# Altium PCB PCBbase.PcbDoc
Units mm, origin at the board's own origin, x right, y up, seen from the top; angles counter-clockwise.
Board outline 75.1 x 58.9 mm, 2 copper layers (Top Layer, Bottom Layer), stack 1.58 mm thick; 42 components, 28 nets, 143 pads, 38 vias.
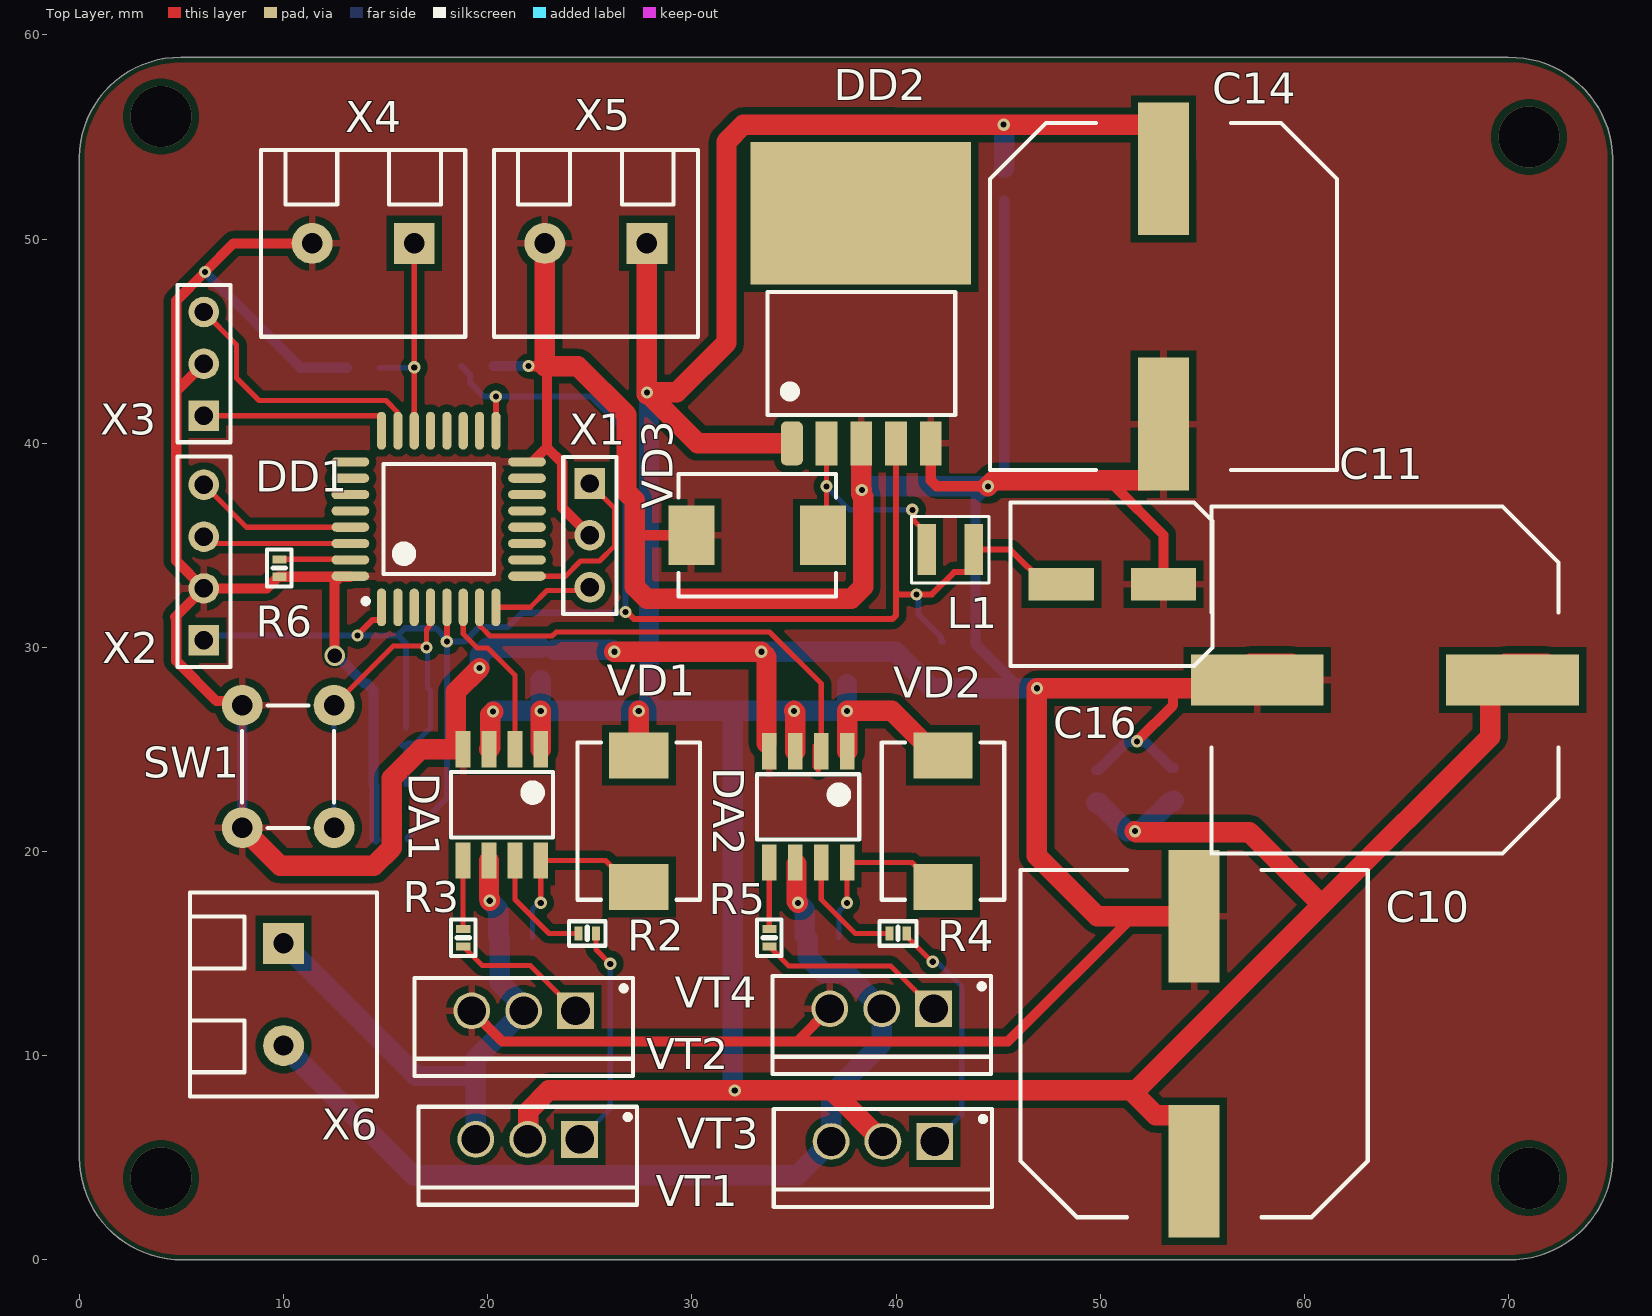
[diagram p0: Top Layer view]
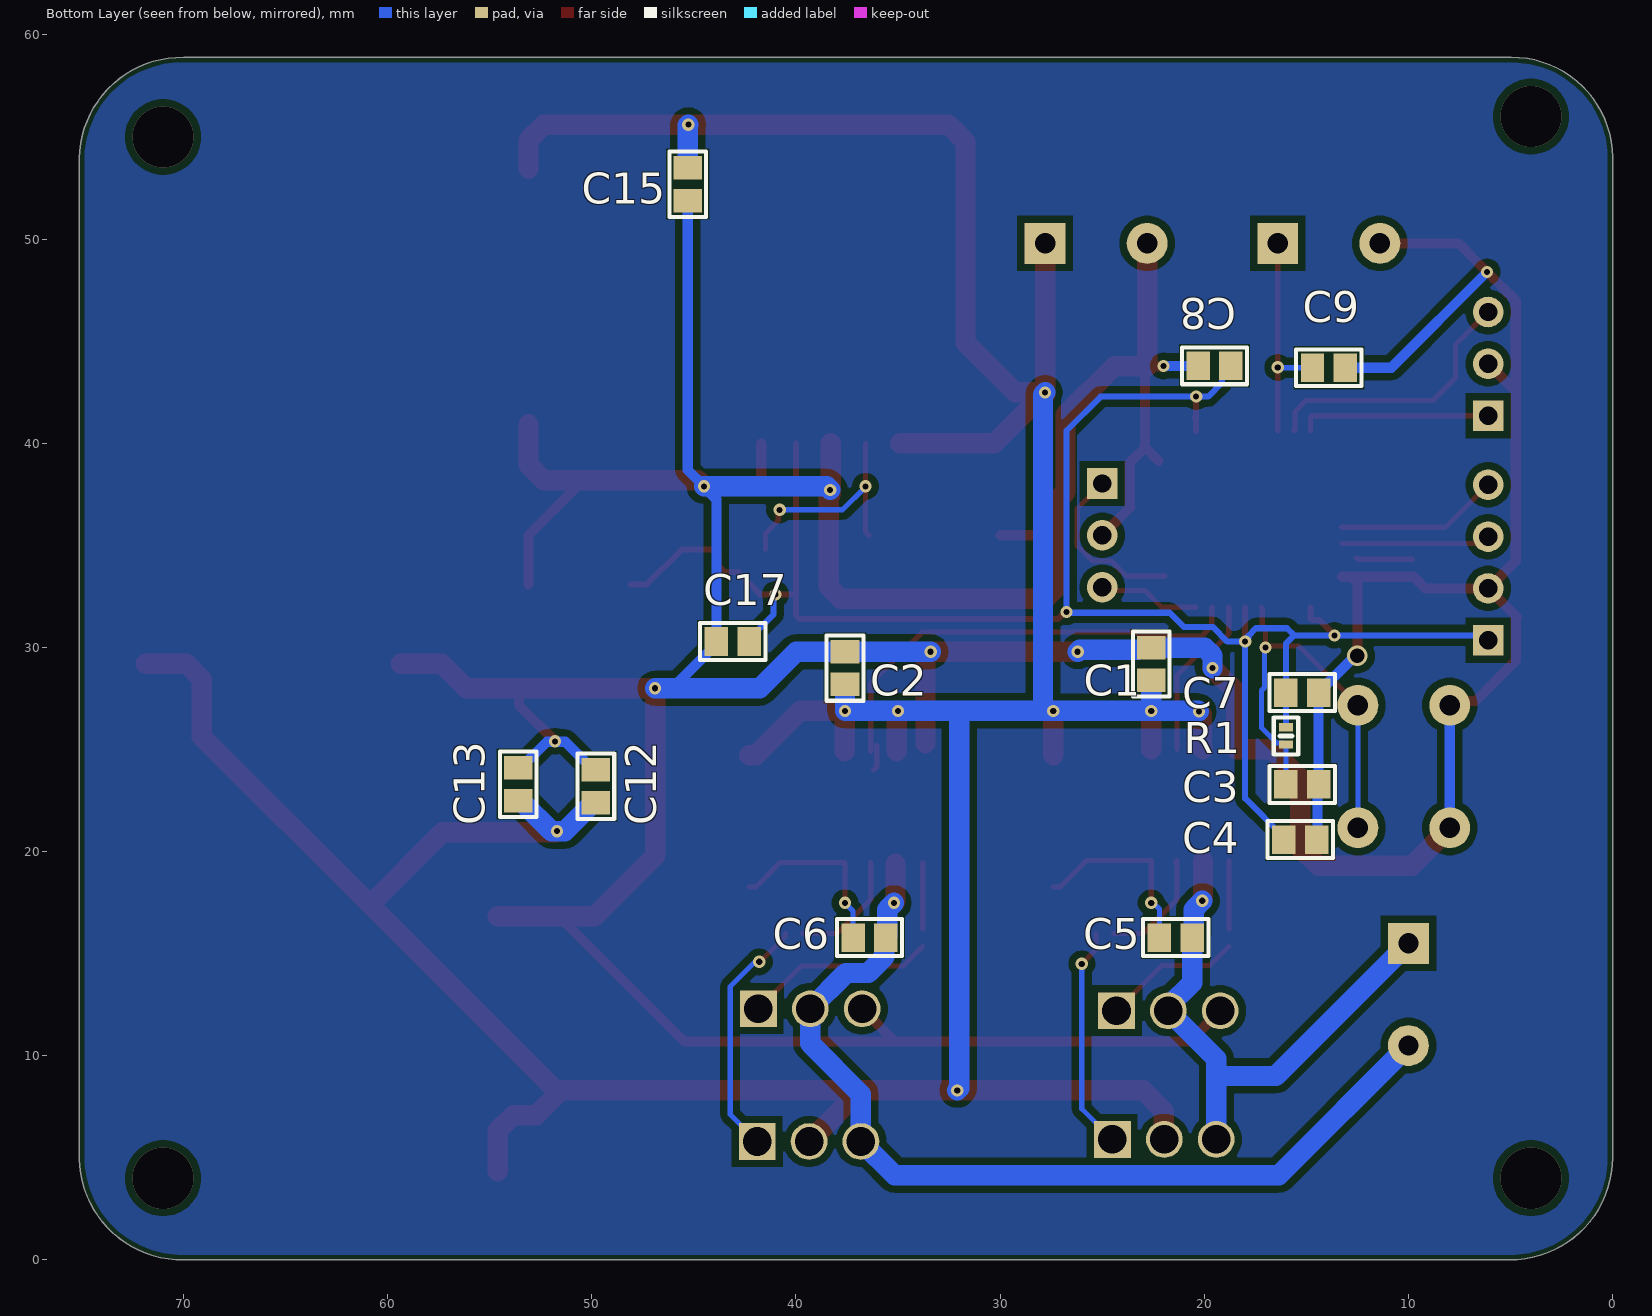
[diagram p1: Bottom Layer view, seen from below]

## Layer stack, top to bottom
Top Solder: solder mask 0.01, Solder Resist, Dk 3.5
Top Layer: signal copper 0.0175
Dielectric 1: dielectric 1.545, FR-4, Dk 4.8
Bottom Layer: signal copper 0.0175
Bottom Solder: solder mask 0.01, Solder Resist, Dk 3.5

## Board outline
0,5 ccw(c5.019,5.019) 5.039,0 69.991,0 ccw(c70.062,5.038) 75.1,4.966 75.1,53.957 ccw(c70.078,53.878) 69.999,58.9 4.971,58.9 ccw(c4.933,53.967) 0,54.004

## Design rules (kind name [scope] priority, off if disabled: settings)
AcuteAngle [All] p1: minimum=3.50000000000000E+0001 checktracksonly=FALSE
BoardOutlineClearance "BoardOutlineClearance 1" [All] p1: gap=0.25 ignorepadtopadclearanceinfootprint=FALSE except(0: Arc-SplitContinuation Track-SplitContinuation SMDPad-SplitContinuation THPad-SplitContinuation Via-SplitContinuation Fill-SplitContinuation Poly-SplitContinuation Region-SplitContinuation Text-SplitContinuation) // Milling
BoardOutlineClearance "BoardOutlineClearance 2" [All] p2: gap=0.4 ignorepadtopadclearanceinfootprint=FALSE except(0: Arc-SplitContinuation Track-SplitContinuation SMDPad-SplitContinuation THPad-SplitContinuation Via-SplitContinuation Fill-SplitContinuation Poly-SplitContinuation Region-SplitContinuation Text-SplitContinuation) // V-Cut
Clearance "Clearance 3 Oz" [All] p1: gap=0.35 ignorepadtopadclearanceinfootprint=FALSE except(0.25: Arc-Hole Track-Hole SMDPad-Hole THPad-Hole Via-Hole Fill-Hole Poly-Hole Region-Hole Text-Hole)
Clearance "Clearance 2 Oz" [All] p2: gap=0.3 ignorepadtopadclearanceinfootprint=FALSE except(0.25: Arc-Hole Track-Hole SMDPad-Hole THPad-Hole Via-Hole Fill-Hole Poly-Hole Region-Hole Text-Hole)
Clearance "Clearance-1 1 Oz" [All] p3: gap=0.2 ignorepadtopadclearanceinfootprint=FALSE except(0.25: Arc-Hole Track-Hole SMDPad-Hole THPad-Hole Via-Hole Fill-Hole Poly-Hole Region-Hole Text-Hole) // Standart
Clearance "Clearance-2 1 Oz" [All] p4: gap=0.15 ignorepadtopadclearanceinfootprint=FALSE except(0.2: Arc-Fill Arc-Poly Track-Fill Track-Poly SMDPad-Fill SMDPad-Poly THPad-Fill THPad-Poly Via-Fill Via-Poly Fill-Fill Fill-Poly Poly-Poly; 0.25: Arc-Hole Track-Hole SMDPad-Hole THPad-Hole Via-Hole Fill-Hole Poly-Hole Region-Hole Text-Hole) // Advance
Clearance "Clearance-1 1/2 Oz" [All] p5: gap=0.125 ignorepadtopadclearanceinfootprint=FALSE except(0.2: Arc-Fill Arc-Poly Track-Fill Track-Poly SMDPad-SMDPad SMDPad-Fill SMDPad-Poly THPad-Fill THPad-Poly Via-Fill Via-Poly Fill-Fill Fill-Poly Poly-Poly Poly-Region Poly-Text; 0.25: Arc-Hole Track-Hole SMDPad-Hole THPad-Hole Via-Hole Fill-Hole Poly-Hole Region-Hole Text-Hole) // Standart
Clearance "Clearance-2 1/2 Oz" [All] p6: gap=0.1 ignorepadtopadclearanceinfootprint=FALSE except(0.15: Arc-Fill Arc-Poly Track-Fill Track-Poly SMDPad-SMDPad SMDPad-Fill SMDPad-Poly THPad-Fill THPad-Poly Via-Fill Via-Poly Fill-Fill Fill-Poly Poly-Poly Poly-Region Poly-Text; 0.25: Arc-Hole Track-Hole SMDPad-Hole THPad-Hole Via-Hole Fill-Hole Poly-Hole Region-Hole Text-Hole) // Advance
DiffPairsRouting "DiffPairsRouting 1 Oz" [All] p1: maxlimit=0.254 minlimit=0.2 mostfreqgap=0.254 toplayer_minwidth=0.2 toplayer_maxwidth=0.381 toplayer_prefwidth=0.381 bottomlayer_minwidth=0.2 bottomlayer_maxwidth=0.381 bottomlayer_prefwidth=0.381 maxuncoupledlength=12.7
DiffPairsRouting "DiffPairsRouting 1/2 Oz" [All] p2: maxlimit=0.254 minlimit=0.1 mostfreqgap=0.254 toplayer_minwidth=0.1 toplayer_maxwidth=0.381 toplayer_prefwidth=0.381 bottomlayer_minwidth=0.1 bottomlayer_maxwidth=0.381 bottomlayer_prefwidth=0.381 maxuncoupledlength=12.7
HoleSize "Minimum HoleSize" [IsPad] p1: absolutevalues=TRUE maxlimit=5.9 minlimit=0.6 maxpercent=80.000 minpercent=20.000
HoleSize "Minimum HoleSize VIA 1" [IsVia] p2: absolutevalues=TRUE maxlimit=5.9 minlimit=0.3 maxpercent=80.000 minpercent=20.000 // Standart
HoleSize "Minimum HoleSize VIA 2" [IsVia] p3: absolutevalues=TRUE maxlimit=5.9 minlimit=0.2 maxpercent=80.000 minpercent=20.000 // Advance
HoleToHoleClearance Hole2HoleClearance [All] p1: gap=0.25 allowstackedmicrovias=FALSE
MinimumAnnularRing "Minimum AR VIA Standart" [IsVia] p1: minimumring=0.15
MinimumAnnularRing "Minimum AR PAD Standart" [IsPAD] p2: minimumring=0.2
MinimumAnnularRing "Minimum AR VIA Advance" [IsVia] p3: minimumring=0.1
MinimumAnnularRing "Minimum AR PAD Advance" [IsPAD] p4: minimumring=0.15
MinimumSolderMaskSliver "SolderMask Bridge Standart" [All] p1: minsoldermaskwidth=0.15 // All Masks
MinimumSolderMaskSliver "SolderMask Bridge Advance" [All] p2: minsoldermaskwidth=0.1 // Mask LDI
PlaneClearance "PlaneClearance 3 Oz" [All] p1: clearance=0.35
PlaneClearance "PlaneClearance 2 Oz" [All] p2: clearance=0.3
PlaneClearance "PlaneClearance 1 Oz" [All] p3: clearance=0.2
PlaneClearance "PlaneClearance-1 1/2 Oz" [All] p4: clearance=0.2 // Standart
PlaneClearance "PlaneClearance-2 1/2 Oz" [All] p5: clearance=0.15 // Advance
PlaneConnect "TermalConnect 3 Oz" [All] p1: planeconnectstyle=Relief reliefexpansion=0.2 reliefentries=4 reliefconductorwidth=0.35 reliefairgap=0.35 // Standart
PlaneConnect "TermalConnect 2 Oz" [All] p2: planeconnectstyle=Relief reliefexpansion=0.2 reliefentries=4 reliefconductorwidth=0.3 reliefairgap=0.3 // Standart
PlaneConnect "TermalConnect-1 1 Oz" [All] p3: planeconnectstyle=Relief reliefexpansion=0.2 reliefentries=4 reliefconductorwidth=0.2 reliefairgap=0.2 // Standart
PlaneConnect "TermalConnect-2 1 Oz" [All] p4: pad.planeconnectstyle=Relief pad.reliefexpansion=0.15 pad.reliefentries=4 pad.reliefconductorwidth=0.2 pad.reliefairgap=0.2 via.planeconnectstyle=Direct via.reliefexpansion=0.15 via.reliefentries=4 via.reliefconductorwidth=0.15 via.reliefairgap=0.15 // Advance
PlaneConnect "TermalConnect-1 1/2 Oz" [All] p5: planeconnectstyle=Relief reliefexpansion=0.2 reliefentries=4 reliefconductorwidth=0.2 reliefairgap=0.2 // Standart
PlaneConnect "TermalConnect-2 1/2 Oz" [All] p6: pad.planeconnectstyle=Relief pad.reliefexpansion=0.15 pad.reliefentries=4 pad.reliefconductorwidth=0.15 pad.reliefairgap=0.15 via.planeconnectstyle=Direct via.reliefexpansion=0.15 via.reliefentries=4 via.reliefconductorwidth=0.15 via.reliefairgap=0.15 // Advance
PolygonConnect "PolygonConnect 3 Oz" [All] p1: thpad.connectstyle=Relief thpad.reliefconductorwidth=0.35 thpad.reliefentries=4 thpad.polygonreliefangle="90 Angle" thpad.airgapwidth=0.35 smdpad.connectstyle=Relief smdpad.reliefconductorwidth=0.35 smdpad.reliefentries=4 smdpad.polygonreliefangle="90 Angle" smdpad.airgapwidth=0.35 via.connectstyle=Direct via.reliefconductorwidth=0.254 via.reliefentries=4 via.polygonreliefangle="90 Angle" via.airgapwidth=0.254
PolygonConnect "PolygonConnect 2 Oz" [All] p2: thpad.connectstyle=Relief thpad.reliefconductorwidth=0.3 thpad.reliefentries=4 thpad.polygonreliefangle="90 Angle" thpad.airgapwidth=0.3 smdpad.connectstyle=Relief smdpad.reliefconductorwidth=0.3 smdpad.reliefentries=4 smdpad.polygonreliefangle="90 Angle" smdpad.airgapwidth=0.3 via.connectstyle=Direct via.reliefconductorwidth=0.254 via.reliefentries=4 via.polygonreliefangle="90 Angle" via.airgapwidth=0.254
PolygonConnect "PolygonConnect-1 1 Oz" [All] p3: thpad.connectstyle=Relief thpad.reliefconductorwidth=0.2 thpad.reliefentries=4 thpad.polygonreliefangle="90 Angle" thpad.airgapwidth=0.2 smdpad.connectstyle=Relief smdpad.reliefconductorwidth=0.2 smdpad.reliefentries=4 smdpad.polygonreliefangle="90 Angle" smdpad.airgapwidth=0.2 via.connectstyle=Direct via.reliefconductorwidth=0.254 via.reliefentries=4 via.polygonreliefangle="90 Angle" via.airgapwidth=0.254 // Standart
PolygonConnect "PolygonConnect-2 1 Oz" [All] p4: thpad.connectstyle=Relief thpad.reliefconductorwidth=0.15 thpad.reliefentries=4 thpad.polygonreliefangle="90 Angle" thpad.airgapwidth=0.15 smdpad.connectstyle=Relief smdpad.reliefconductorwidth=0.15 smdpad.reliefentries=4 smdpad.polygonreliefangle="90 Angle" smdpad.airgapwidth=0.15 via.connectstyle=Direct via.reliefconductorwidth=0.254 via.reliefentries=4 via.polygonreliefangle="90 Angle" via.airgapwidth=0.254 // Advance
PolygonConnect "PolygonConnect-1 1/2 Oz" [All] p5: thpad.connectstyle=Relief thpad.reliefconductorwidth=0.15 thpad.reliefentries=4 thpad.polygonreliefangle="90 Angle" thpad.airgapwidth=0.2 smdpad.connectstyle=Relief smdpad.reliefconductorwidth=0.2 smdpad.reliefentries=4 smdpad.polygonreliefangle="90 Angle" smdpad.airgapwidth=0.2 via.connectstyle=Direct via.reliefconductorwidth=0.254 via.reliefentries=4 via.polygonreliefangle="90 Angle" via.airgapwidth=0.254 // Standart
PolygonConnect "PolygonConnect-2 1/2 Oz" [All] p6: thpad.connectstyle=Relief thpad.reliefconductorwidth=0.125 thpad.reliefentries=4 thpad.polygonreliefangle="90 Angle" thpad.airgapwidth=0.15 smdpad.connectstyle=Relief smdpad.reliefconductorwidth=0.125 smdpad.reliefentries=4 smdpad.polygonreliefangle="90 Angle" smdpad.airgapwidth=0.15 via.connectstyle=Direct via.reliefconductorwidth=0.254 via.reliefentries=4 via.polygonreliefangle="90 Angle" via.airgapwidth=0.254 // Advance
RoutingCorners [All] p1 off: cornerstyle=45-Degree minsetback=2.54 maxsetback=2.54
RoutingVias [All] p1: holewidth=0.3 width=0.6 viastyle="Through Hole" minholewidth=0.2 minwidth=0.4 maxholewidth=5.9 maxwidth=6.4
SilkToSilkClearance Silk2SilkClearance [All] p1 off: silktosilkclearance=0.15
SilkToSolderMaskClearance Silk2SolderMaskClearance [IsPad] p1 off: minsilkscreentomaskgap=0.15 clearancetoexposedcopper=TRUE
SolderMaskExpansion SolderMaskExpansion-1 [All] p1: expansion=0.05 istentingtop=FALSE // Standart
SolderMaskExpansion "SolderMaskExpansion LDI" [All] p2: expansion=0.025 istentingtop=FALSE // Advance
UnRoutedNet [All] p1: checkbadconnections=TRUE
Width Width_powerM+ [InNet('+motor')] p1: maxlimit=1 minlimit=1 preferedwidth=1
Width Width_GND [InNet('GND')] p2: maxlimit=1 minlimit=0.3 preferedwidth=0.5
Width Width_powerM- [InNet('-motor')] p3: maxlimit=1 minlimit=1 preferedwidth=1
Width Width_Power [InNet('+12V')] p4: maxlimit=1 minlimit=1 preferedwidth=1 checkconnectedcopper=TRUE
Width [InNet('+3.3V')] p5: maxlimit=0.35 minlimit=0.3 preferedwidth=0.3 checkconnectedcopper=TRUE
20 further rules are at their usual default settings.

## Components (designator, comment, footprint, x,y, rotation, side; value= is the part's Value field where it differs from the comment)
C1 "1мкФ" "CAP 10 uF" 22.6,29.188 r270 bottom
C2 "1мкФ" "CAP 10 uF" 37.6,28.988 r270 bottom
C3 "10мкФ" "CAP 10 uF" 15.2,23.288 r0 bottom
C4 "10мкФ" "CAP 10 uF" 15.3,20.588 r0 bottom
C5 "1мкФ" "CAP 10 uF" 21.4,15.788 r0 bottom
C6 "1мкФ" "CAP 10 uF" 36.4,15.788 r0 bottom
C7 "10мкФ" "CAP 10 uF" 15.2,27.788 r180 bottom
C8 "10мкФ" "CAP 10 uF" 19.5,43.788 r180 bottom
C9 "10мкФ" "CAP 10 uF" 13.9,43.7 r180 bottom
C10 "1000мкФ" "cap 1000" 54.606,10.588 r90 top
C11 "1000мкФ" "cap 1000" 63.95,28.4 r180 top
C12 "10мкФ" "CAP 10 uF" 49.8,23.2 r90 bottom
C13 "10мкФ" "CAP 10 uF" 53.6,23.3 r90 bottom
C14 "1000мкФ" "cap 1000" 53.1,47.188 r270 top
C15 "10мкФ" "CAP 10 uF" 45.3,52.688 r270 bottom
C16 "220мкФ" "Capacitor 220nF E" 50.6,33.088 r0 top
C17 "10мкФ" "CAP 10 uF" 43.1,30.288 r0 bottom
DA1 "IR2104" IR2104 20.7,22.288 r270 top
DA2 "IR2104" IR2104 35.7,22.188 r270 top
DD1 "STM32F030K6T6" QFP32(7x7) 17.6,36.288 r90 top
DD2 "LM2596S" LM2596 38.3,50.488 r270 top
L1 "Inductor" INDUCTOR 41.5,34.788 r90 top value="33 uH"
R1 "430R" 0402 16,25.663 r90 bottom value="430 Ом"
R2 "Resistor" 0402 24.875,15.988 r0 top value="10 Ом"
R3 "Resistor" 0402 18.8,15.775 r270 top value="10 Ом"
R4 "Resistor" 0402 40.1,15.988 r0 top value="10 Ом"
R5 "Resistor" 0402 33.8,15.775 r270 top value="10 Ом"
R6 "430R" 0402 9.8,33.888 r270 top value="430 Ом"
SW1 "Button" button 10.5,24.088 r90 top
VD1 "SK34" SK34 27.4,21.488 r270 top
VD2 "SK34" SK34 42.3,21.488 r270 top
VD3 "SK34" SK34 33.2,35.488 r0 top
VT1 "IRF100B202" TO-220AB 21.96,5.9 r180 top
VT2 "IRF100B202" TO-220AB 21.76,12.2 r180 top
VT3 "IRF100B202" TO-220AB 39.36,5.8 r180 top
VT4 "IRF100B202" TO-220AB 39.3,12.3 r180 top
X1 "3pin" 3pin 25,38.028 r270 top
X2 "4pin" 4pin 6.1,30.348 r90 top
X3 "3pin" 3pin 6.1,41.348 r90 top
X4 "2pin" 2pin5mmVintKlemm 13.9,49.788 r180 top
X5 "2pin" 2pin5mmVintKlemm 25.3,49.788 r180 top
X6 "2pin" 2pin5mmVintKlemm 10,13 r270 top

## Footprints (in the part's own frame and the unit in brackets; to place one, negate y for a bottom-side part, rotate by r counter-clockwise, add the part's x,y. Pads: shape width x height; smd on the part's side, far side on the other; paste and mask are expansions set on the pad)
2pin5mmVintKlemm [mm]
  rect 2x2 hole 1: 1(-2.5,0)
  round 2 hole 1: 2(2.5,0)
  round 0.5 on Mech1: 13(-4.4,-3.9)
  silkscreen extent -5,-4.57 5,4.57, body extent -5.08,-4.44 5.08,4.56, height 12.5
3pin [mm]
  rect 1.5x1.5 hole 0.9: 1(0,0)
  round 1.5 hole 0.9: 2(2.54,0) 3(5.08,0)
  silkscreen extent -1.3,-1.3 6.4,1.3, body extent -1.27,-1.27 6.35,1.27, height 8.44
4pin [mm]
  rect 1.5x1.5 hole 0.9: 1(0,0)
  round 1.5 hole 0.9: 2(2.54,0) 3(5.08,0) 4(7.62,0)
  silkscreen extent -1.3,-1.3 9,1.3, body extent -1.27,-1.27 8.89,1.27, height 8.44
0402 [mm]
  rect 0.4x0.7 smd: 1(-0.425,0) 2(0.425,0)
  silkscreen extent -0.9,-0.6 0.9,0.6, body extent -0.5,-0.25 0.5,0.25, height 0.3
button [mm]
  round 2 hole 1: 1(-2.925,2.525) 1(3.075,2.525) 2(-2.925,-1.975) 2(3.075,-1.975)
  silkscreen extent -2.92,-1.98 3.08,2.52, body extent -3.87,-2.75 4.03,3.25, height 7.04
"CAP 10 uF" [mm] "Chip Capacitor, 2-Leads, Body 1,93x1,25mm, IPC Medium Density"
  rect 1.15x1.4 smd: 1(-0.8,0) 2(0.8,0)
  silkscreen extent -1.6,-0.9 1.6,0.9, body extent -1,-0.67 1,0.67, height 1.45
"cap 1000" [mm] "Aluminum Electrolytic Capacitor, Body 17,00x17,00x17,00mm, IPC Low Density"
  rect 6.5x2.5 smd: 1(-6.25,0) 2(6.25,0)
  silkscreen extent -8.5,-8.5 8.5,8.5, body extent -8.6,-8.6 8.6,8.6, height 17
"Capacitor 220nF E" [mm]
  rect 3.2x1.6 smd: 1(-2.5,0) 2(2.5,0)
  silkscreen extent -5,-4 4.9,4, body extent -3.65,-3.3 3.65,3.3, height 7.7
INDUCTOR [mm]
  rect 2.5x0.9 smd: 1(0,0) 2(0,-2.3)
  silkscreen extent -1.62,-3.05 1.63,0.75, body extent -1.36,-2.75 1.36,0.45, height 2
IR2104 [mm] "SOIC, 8-Leads, Body 4,90x3,90mm, Pitch 1,27mm, IPC Medium Density"
  rect 1.78x0.72 smd: 1(-2.725,1.905) 2(-2.725,0.635) 3(-2.725,-0.635) 4(-2.725,-1.905) 5(2.725,-1.905) 6(2.725,-0.635) 7(2.725,0.635) 8(2.725,1.905)
  silkscreen extent -1.6,-2.5 1.6,2.5, body extent -3,-2.45 3,2.45, height 1.75
LM2596 [mm]
  rrect50% 2.16x1.07 smd: 1(10.495,-3.4)
  rect 2.16x1.07 smd: 2(10.495,-1.7) 3(10.495,0) 4(10.495,1.7) 5(10.495,3.4)
  rect 6.98x10.8 smd: 6(-0.775,-0.025)
  silkscreen extent 3.08,-4.6 9.1,4.6, body extent -3.42,-5.1 11.22,5.06, height 4.57
QFP32(7x7) [mm]
  oval 1.85x0.45 smd: 1(-4.325,2.8) 2(-4.325,2) 3(-4.325,1.2) 4(-4.325,0.4) 5(-4.325,-0.4) 6(-4.325,-1.2) 7(-4.325,-2) 8(-4.325,-2.8) 17(4.325,-2.8) 18(4.325,-2) 19(4.325,-1.2) 20(4.325,-0.4) 21(4.325,0.4) 22(4.325,1.2) 23(4.325,2) 24(4.325,2.8)
  oval 0.45x1.85 smd: 9(-2.8,-4.325) 10(-2,-4.325) 11(-1.2,-4.325) 12(-0.4,-4.325) 13(0.4,-4.325) 14(1.2,-4.325) 15(2,-4.325) 16(2.8,-4.325) 25(2.8,4.325) 26(2,4.325) 27(1.2,4.325) 28(0.4,4.325) 29(-0.4,4.325) 30(-1.2,4.325) 31(-2,4.325) 32(-2.8,4.325)
  silkscreen extent -4.15,-2.7 2.7,3.7, body extent -4.5,-4.5 4.5,4.5, height 1.48
SK34 [mm] "Molded Capacitor, 2-Leads, Body 7,20x5,80mm, IPC Medium Density"
  rect 2.25x2.9 smd: 1(-3.225,0) 2(3.225,0)
  silkscreen extent -3.85,-3 3.85,3, body extent -3.98,-2.95 3.98,2.95, height 2.3
TO-220AB [mm] "TO, Thru-Hole, Vertical, Heatsink Mounted; 3 In-Line Leads; Pitch 2.54 mm"
  rect 1.8x1.8 hole 1.4: 1(-2.54,0)
  round 1.8 hole 1.4: 2(0,0) 3(2.54,0)
  silkscreen extent -5.35,-1.6 5.35,3.2, body extent -5.34,-1.61 5.34,3.22, height 22.76

## Part data
C1 C2 C5 C6: library part "Capacitor 0805", "GRM21BR71H105K"
C3 C4 C7 C8 C9 C12 C13 C15 C17: library part "Capacitor 0805", "0805X106K350SNT"
C10 C11 C14: library part "Capacitor  El"
C16: library part "CAPACIATOR E D6.3"
R1 R6: library part Resistor, TU=ШКАБ.434110.002ТУ
VT1 VT2 VT3 VT4: library part IRF3205PBF, "N-Channel 55V 110A _Tc_ 200W _Tc_ Through Hole TO-220AB", Package="TO-220 International Rectifier", Availability=Unavailable, MF="Infineon Technologies", MP=IRF3205PBF, Price=None, SnapEDA_Link=https://www.snapeda.com/parts/IRF3205PBF/Infineon%20Technologies/view-part/98571/?ref=snap
X2: library part 4pin_1, LineName1=+3.3V, LineName2=GND, LineName3=SDA, LineName4=SCL
L1: Code_IEC=1005, Code_JEITA=0402, LatestRevisionDate=29-May-2009, LatestRevisionNote="IPC-7351 Footprint Added.", PackageDescription="Chip Inductor", PackageReference=0402-A, Published=8-Jun-2000, Publisher="Altium Limited"
R2 R3 R4 R5: TU=ШКАБ.434110.002ТУ
X1: LineName1=RX, LineName2=GND, LineName3=TX
X3: LineName1=SWCLK, LineName2=GND, LineName3=SWDIO
X4: LineName1=BRB, LineName2=GND
X5: LineName1=+12V, LineName2=GND
X6: LineName1="+ motor", LineName2="- motor"

## Via types
v1: diameter 0.6, hole 0.3, Top Layer to Bottom Layer, 33 vias
v2: diameter 3, hole 3, Top Layer to Bottom Layer, 4 vias
v3: diameter 1, hole 0.711, Top Layer to Bottom Layer, 1 vias

## Nets (pads, with @x,y where several pads share a name; then routed paths per layer and width w, separated by ;. In a path a pad name is that pad's centre, name@x,y a point inside that pad or via, vN(x,y) a via of type N, cw(c..) or ccw(c..) an arc to the next point about the centre after c; other vN are vias at no path point)
+3.3V: C4.2 C7.1 C8.2 C16.1 C17.1 DD1.1 DD1.5 DD1.17 DD2.4 L1.2 R1.2 X2.1 | length 96.6
  Top Layer w0.3: v1@13.6,30.588 14.36,31.348 14.731,31.348 14.8,31.418 DD1.1 ; v1(18,30.288) DD1.5 ; v1(20.4,42.288) DD1.17 20.4,41.219 DD1.17@20.469,41.288 ; v1(26.75,31.729) 26.831,31.729 27.172,31.388 39.824,31.388 40,31.564 40,32.716 ; DD2.4 40,32.716 ; C16.1 47.3,33.088 45.6,34.788 L1.2 43.8,33.988 43.5,33.688 42.841,33.688 41.75,32.598 41.009,32.598 v1(41,32.588) 40.128,32.588 40,32.716
  Bottom Layer w0.3: X2.1 6.34,30.588 15.6,30.588 ; R1.2 C7.1 16,30.188 15.6,30.588 ; C4.2 16.1,20.713 18,22.613 v1(18,30.288) ; C8.2 19.125,43.363 19.125,42.981 19.818,42.288 v1(20.4,42.288) 25.072,42.288 26.75,40.61 v1(26.75,31.729) 26.72,31.698 21.698,31.698 21,31 19.583,31 18.872,30.288 v1(18,30.288) ; v1(41,32.588) 41,32.507 41.1,32.407 41.1,31.613 42.2,30.513 42.2,30.288 C17.1 ; 15.6,30.588 15.95,30.938 17.469,30.938 17.85,30.557 17.85,30.438 v1(18,30.288)
  other v1: 13.626,30.588
+12V: C1.2 C2.2 C10.1 C11.1 C12.1 C13.1 C14.1 C15.1 DA1.1 DA1.3 DA2.1 DA2.3 DD2.1 VD1.1 VD2.1 VT1.2 VT3.2 X5.1 | length 214.3
  Top Layer w1: DA1.3 20.125,25.073 20.125,26.704 20.266,26.845 v1(20.266,26.859) ; VT1.2 21.977,5.917 21.977,7.277 23,8.3 v1(32.1,8.3) 36.86,8.3 ; v1(22.6,26.888) 22.605,26.883 DA1.1 ; VD1.1 v1(27.4,26.888) ; v1@27.8,42.388 v1(27.8,42.488) ; X5.1 27.8,43.788 ; DD2.1 30.295,39.993 v1(27.8,42.488) ; v1(35.005,26.888) 35.065,26.828 DA2.3 ; DA2.1 37.605,26.883 v1(37.6,26.888) 39.8,26.888 41.975,24.713 VD2.1 ; VT3.2 36.86,8.3 ; v1(51.7,21) 51.762,20.938 57.314,20.938 60.861,17.391 ; C14.1 53.1,54.853 52.35,55.603 v1(45.272,55.603) 32.523,55.603 31.695,54.775 31.695,44.917 29.266,42.488 v1(27.8,42.488) ; C10.1 54.606,6.338 53.856,7.088 52.712,7.088 51.5,8.3 ; C11.1@71.85,29.2 69.85,29.2 69.1,28.45 69.1,25.63 60.861,17.391 ; v1(27.8,42.488) 27.8,43.788 ; v1(27.8,42.488) 27.8,43.788 ; 36.86,8.3 51.5,8.3 ; 51.5,8.3 51.77,8.3 60.861,17.391
  Bottom Layer w1: v1(20.266,26.859) 20.294,26.888 v1(22.6,26.888) ; C1.2 v1(22.6,26.888) ; v1(27.8,42.488) 27.9,42.388 27.9,26.888 ; v1(32.1,8.3) 32,8.4 32,26.888 ; C2.2 v1(37.6,26.888) v1(35.005,26.888) 32,26.888 ; v1(45.272,55.603) 45.3,55.575 C15.1 ; C12.1 49.925,22.4 51.325,21 v1(51.7,21) 51.975,21 53.4,22.425 53.525,22.425 C13.1 ; v1(22.6,26.888) v1(27.4,26.888) 27.9,26.888 ; 27.9,26.888 32,26.888
+motor: C5.1 DA1.6 VT1.3 VT2.2 X6.1 | length 27.7
  Top Layer w1: DA1.6 20.065,17.723 20.1,17.688 v1(20.1,17.588)
  Bottom Layer w1: X6.1 16.491,9.009 19.42,9.009 ; VT1.3@19.267,6.053 VT1.3 19.42,9.009 ; v1(20.1,17.588) 20.525,17.163 20.525,15.863 C5.1 20.6,13.576 21.76,12.416 VT2.2 19.42,9.86 19.42,9.009
-motor: C6.1 DA2.6 VT3.3 VT4.2 X6.2 | length 47.1
  Top Layer w1: DA2.6@35.125,19.403 35.125,17.563 v1(35.2,17.488)
  Bottom Layer w1: X6.2 16.35,4.15 35.17,4.15 VT3.3 36.82,8.12 39.3,10.6 VT4.2 37.55,14.05 36.461,14.05 35.675,14.836 35.675,15.713 C6.1 35.525,15.863 35.525,17.163 v1(35.2,17.488)
GND: C1.1 C2.1 C3.1 C4.1 C7.2 C8.1 C9.2 C10.2 C11.2 C12.2 C13.2 C14.2 C15.2 C16.2 C17.2 DA1.4 DA2.4 DD1.16 DD1.32 DD2.3 DD2.5 R6.2 SW1.1 VD3.1 VT2.3 VT4.3 X1.2 X2.2 X3.2 X4.2 X5.2 | length 306.7
  Top Layer w0.3: DD1.32@12.725,33.419 12.769,33.463 12.794,33.488 DD1.32
  Top Layer w0.5: X3.2 4.75,42.538 ; SW1.1@7.975,27.163 7.763,27.376 6.713,27.376 4.75,29.338 4.75,31.438 4.7,31.488 X2.2 ; X4.2@12.044,49.788 X4.2 7.551,49.788 v1(6.15,48.388) 4.75,46.987 4.75,42.538 ; v3(12.5,29.588) 12.5,33.194 DD1.32@12.725,33.419 ; DD1.32@13.25,33.463 12.769,33.463 R6.2 9.75,33.463 9.175,32.888 X2.2 ; VT2.3 20.72,10.7 35.16,10.7 ; v1(22,43.788) 22.019,43.769 22.8,43.769 22.876,43.769 ; DD1.16@22.248,39.14 22.9,39.793 ; 22.9,43.745 22.9,39.793 ; X1.2 23.65,36.838 23.65,39.043 22.9,39.793 ; 27.204,35.466 27.227,35.488 VD3.1 ; VT4.3 35.16,10.7 ; DD2.5 41.7,38.181 41.993,37.888 v1(44.5,37.888) ; 50.714,37.888 53.1,35.502 C16.2 ; 51.612,16.838 45.473,10.7 35.16,10.7 ; v1(51.8,25.4) 53.573,27.173 53.573,28 ; 4.75,42.538 4.75,34.238 X2.2
  Top Layer w1: SW1.1@7.975,21.163 9.838,19.3 14.426,19.3 15.3,20.174 15.3,23.588 16.725,25.013 18.435,25.013 18.435,27.823 v1(19.6,28.988) ; 22.8,43.769 X5.2 ; 22.9,43.745 22.876,43.769 24.419,43.769 26.8,41.388 26.8,37.61 27.204,37.206 27.204,35.466 27.204,32.974 27.79,32.388 37.814,32.388 38.4,32.974 38.4,37.388 38.327,37.461 v1@38.327,37.515 ; v1(26.204,29.784) v1(33.402,29.784) 33.655,29.531 DA2.4@33.655,25.303 ; v1@38.3,37.515 v1@38.3,37.715 ; DD2.3 38.3,37.742 v1(38.327,37.715) ; v1(44.5,37.888) 44.8,38.188 52.35,38.188 53.1,38.938 C14.2 ; C10.2 51.612,16.838 49.862,16.838 46.9,19.8 v1(46.9,28) 53.573,28 C11.2@56.1,28 ; C11.2@56.15,28 57.35,29.2 C11.2@59.35,29.2
  Bottom Layer w0.5: v1(6.15,48.388) 10.838,43.7 C9.2 ; SW1.1@7.975,21.163 SW1.1@7.975,27.163 ; v3@12.5,29.688 13.95,28.238 14.075,28.238 14.4,27.913 C7.2 C3.1 14.45,23.238 14.45,20.638 C4.1 ; C8.1 v1(22,43.788) ; C15.2 45.3,38.688 v1(44.5,37.888) 44.5,37.861 43.9,37.261 C17.2 43.9,30.163 46.044,28.019 46.881,28.019 v1(46.9,28) ; C12.2 49.925,24 51.306,25.381 51.781,25.381 v1(51.8,25.4) 51.819,25.381 52.194,25.381 53.475,24.1 C13.2
  Bottom Layer w1: v1(19.6,28.988) 19.6,29.602 19.986,29.988 C1.1 ; C1.1@23.268,29.888 26.1,29.888 v1(26.204,29.784) ; v1(33.402,29.784) 37.596,29.784 C2.1 39.989,29.788 41.777,28 v1(46.9,28) ; v1(38.327,37.715) 38.5,37.888 v1(44.5,37.888)
NetC3_2: C3.2 DD1.4 R1.1 SW1.2 | length 21.6
  Top Layer w0.254: SW1.2@12.475,21.163 SW1.2@12.6,21.039 ; SW1.2@12.475,27.163 15.378,30.066 16.934,30.066 v1(17,30) 17,30.87 17.102,30.972 17.102,31.027 17.163,31.087 17.163,31.926 DD1.4
  Bottom Layer w0.254: SW1.2@12.475,21.163 SW1.2@12.475,27.163 ; R1.1@15.8,25.165 15.873,25.238 R1.1 16.073,25.311 16.448,25.311 17.2,26.064 17.2,27.885 17.052,28.033 17.052,29.948 v1(17,30) ; C3.2 R1.1@16,25.165
NetC5_2: C5.2 DA1.8 VD1.2 | length 9.3
  Top Layer w0.254: v1(22.6,17.488) 22.603,17.491 22.603,19.561 DA1.8 25.775,19.563 27.075,18.263 VD1.2
  Bottom Layer w0.254: C5.2 22.2,17.188 22.5,17.488 v1(22.6,17.488)
NetC6_2: C6.2 DA2.8 VD2.2 | length 9
  Top Layer w0.254: v1(37.6,17.488) 37.605,17.493 DA2.8 40.775,19.463 41.975,18.263 VD2.2
  Bottom Layer w0.254: C6.2 37.2,17.088 v1(37.6,17.488)
NetC9_1: C9.1 DD1.22 X4.1 | length 11.1
  Top Layer w0.254: DD1.22 X4.1@16.4,49.681 ; X4.1 X4.1@16.615,49.573
  Bottom Layer w0.254: C9.1 16.384,43.7 v1(16.4,43.716)
NetDA1_5: DA1.5 R3.1 | length 3.4
  Top Layer w0.254: R3.1@18.795,16.2 DA1.5
NetDA1_7: DA1.7 R2.1 | length 5.8
  Top Layer w0.254: DA1.7@21.418,19.481 DA1.7 21.335,17.654 23.001,15.988 R2.1
NetDA2_5: DA2.5 R5.1 | length 3.3
  Top Layer w0.254: R5.1@33.795,16.2 DA2.5
NetDA2_7: DA2.7 R4.1 | length 5.8
  Top Layer w0.254: DA2.7 36.335,17.654 38.001,15.988 R4.1
NetDD1_23: DD1.23 X3.3 | length 13.4
  Top Layer w0.254: X3.3 7.7,44.828 7.7,43.188 8.8,42.088 15.018,42.088 15.092,42.014 15.563,41.543 15.563,40.651 DD1.23
NetDD1_24: DD1.24 X3.1 | length 9.4
  Top Layer w0.254: X3.1 14.71,41.348 14.8,41.258 DD1.24
NetDD1_29: DD1.29 X2.4 | length 8
  Top Layer w0.254: X2.4 8.18,35.888 DD1.29
NetDD1_30: DD1.30 X2.3 | length 7.3
  Top Layer w0.254: X2.3 6.437,35.428 6.777,35.088 DD1.30
NetDD1_31: DD1.31 R6.1 | length 2.8
  Top Layer w0.254: R6.1 12.502,34.313 DD1.31@12.575,34.386
NetDD2_2: DD2.2 L1.1 VD3.2 | length 11.5
  Top Layer w0.254: VD3.2 36.6,35.663 v1(36.6,37.888) DD2.2 ; v1(40.8,36.738) 40.866,36.672 40.866,36.222 41.5,35.588 L1.1
  Bottom Layer w0.254: v1(36.6,37.888) 36.6,37.861 37.722,36.738 v1(40.8,36.738)
NetR2_2: R2.2 VT1.1 | length 11
  Top Layer w0.254: R2.2 25.3,15.2 v1(26,14.5)
  Bottom Layer w0.254: VT1.1 26,7.4 v1(26,14.5)
NetR3_2: R3.2 VT2.1 | length 6.8
  Top Layer w0.254: R3.2 19.735,14.415 22.085,14.415 VT2.1
NetR4_2: R4.2 VT3.1 | length 12
  Top Layer w0.254: R4.2 40.525,15.838 41.763,14.6 v1(41.8,14.6)
  Bottom Layer w0.254: v1(41.8,14.6) 41.866,14.534 42.081,14.534 43.217,13.398 43.217,7.117 VT3.1
NetR5_2: R5.2 VT4.1 | length 9.3
  Top Layer w0.254: R5.2 34.75,14.4 39.74,14.4 VT4.1
PWM1: DA1.2 DD1.6 | length 8.3
  Top Layer w0.254: DD1.6 18.8,30.657 19.492,29.965 20.005,29.965 21.335,28.635 DA1.2
PWM2: DA2.2 DD1.7 | length 23.6
  Top Layer w0.254: DD1.7 19.638,31.926 19.638,31.033 20.109,30.561 23.155,30.561 23.355,30.761 33.807,30.761 36.335,28.233 DA2.2 ; DA2.2@36.042,25.2 36.042,24.146 36.2,23.988
USART_RX: DD1.9 X1.1 | length 8.5
  Top Layer w0.254: DD1.9@21.963,33.526 DD1.9 23.805,33.488 24.551,34.234 25.481,34.234 26.227,34.98 26.227,36.801 X1.1
USART_TX: DD1.8 X1.3 | length 5
  Top Layer w0.254: DD1.8 22.084,31.963 22.907,32.786 24.838,32.786 X1.3
VIOUT: DD1.12
pads on no net: DD1.2 DD1.3 DD1.10 DD1.11 DD1.13 DD1.14 DD1.15 DD1.18 DD1.19 DD1.20 DD1.21 DD1.25 DD1.26 DD1.27 DD1.28 DD2.6 X4.13 X5.13 X6.13
copper on no net:
  other v2: 4,4 71,4 71,55 4,56

## Polygon pours and split planes (outlines as drawn)
GND on Top Layer "GND_L01_P001" (solid, pour order 1): 83,49 70,62 8,62
GND on Top Layer "GND_L01_P000" (solid, pour order 0): -1,59 76,59 76,-1 -1,-1 -1,38 -2,39
no net on Bottom Layer "NONET_L02_P002" (solid, pour order 2): -1,59 76,59 76,-1 -1,-1

## Silkscreen, mask and mechanical layers (free items; w line width, h text height)
Mechanical 1:
  the board outline again, w0.254